# Altium PCB PCB2.PcbDoc
Units mil, origin at the board's own origin, x right, y up, seen from the top; angles counter-clockwise.
Board outline 1968.5 x 2677.17 mil, 2 copper layers (Top Layer, Bottom Layer); 12 components, 9 nets, 57 pads, 13 vias.
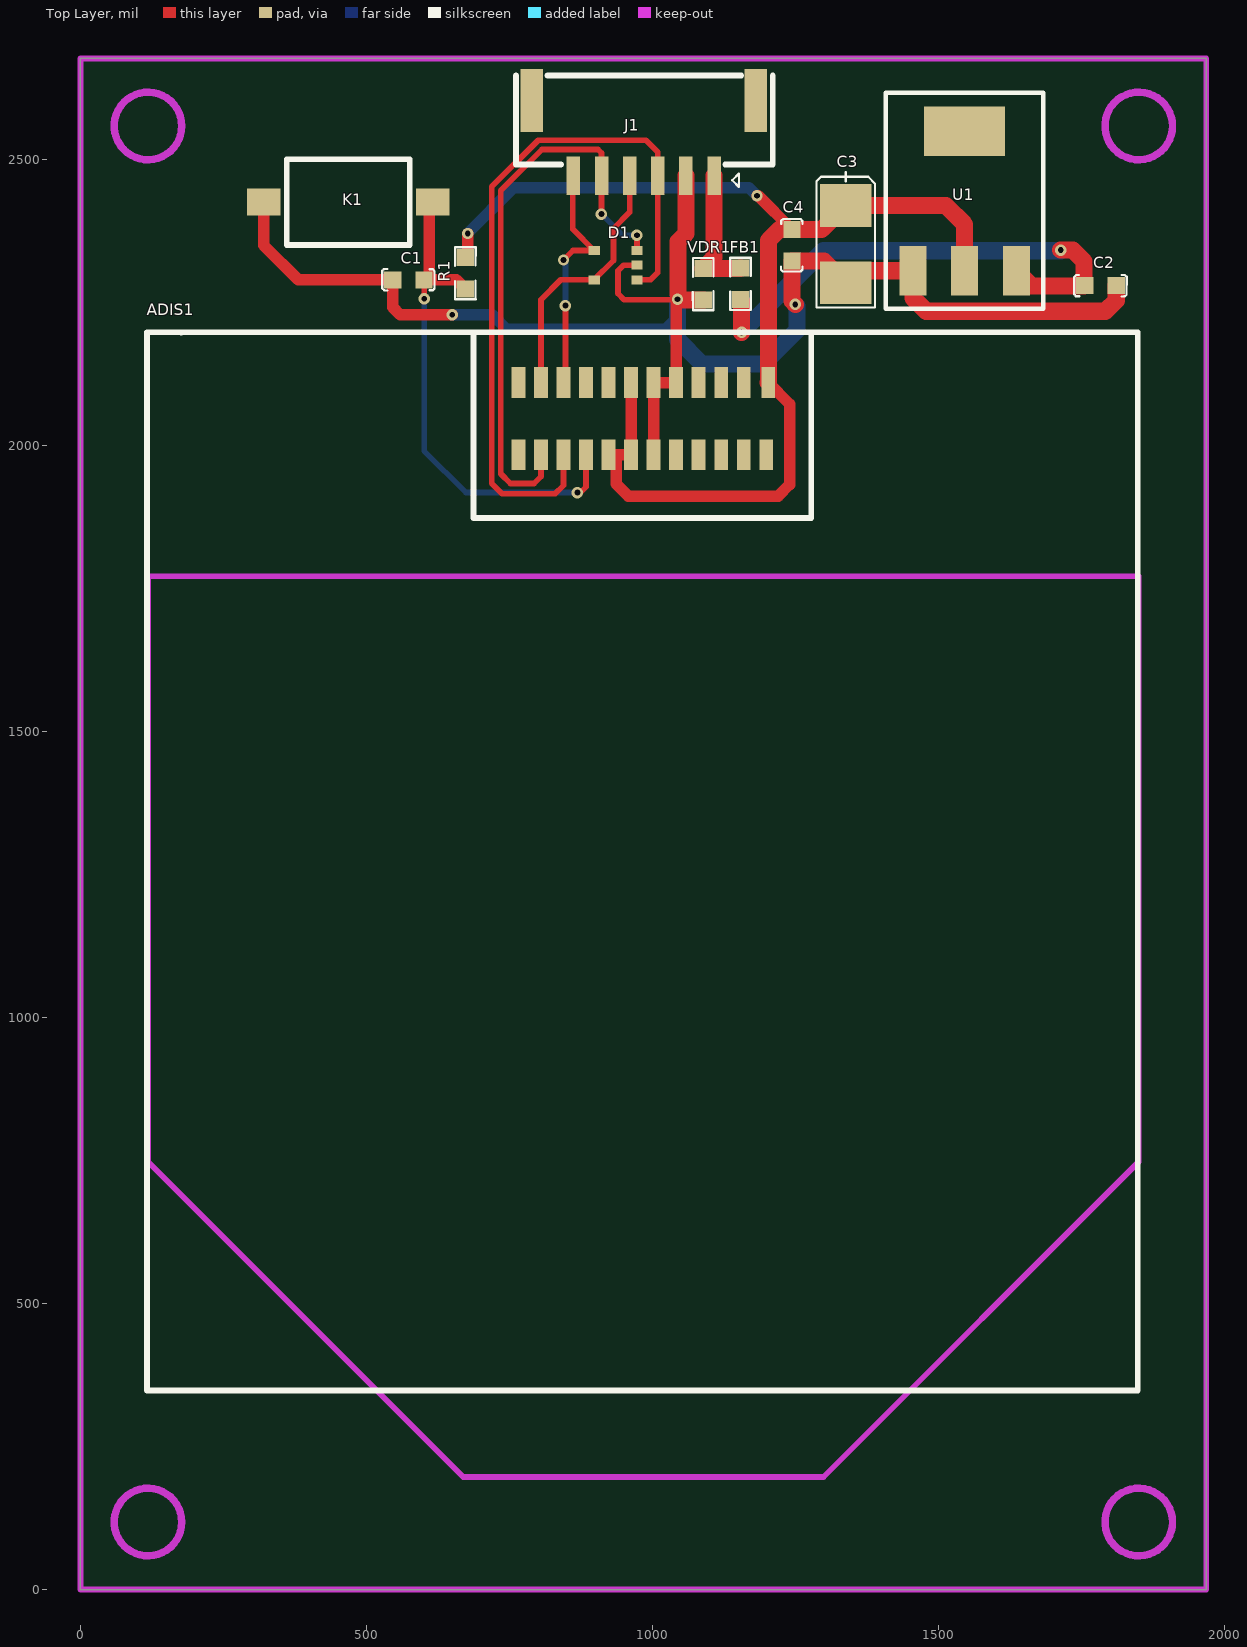
[diagram p0: Top Layer view]
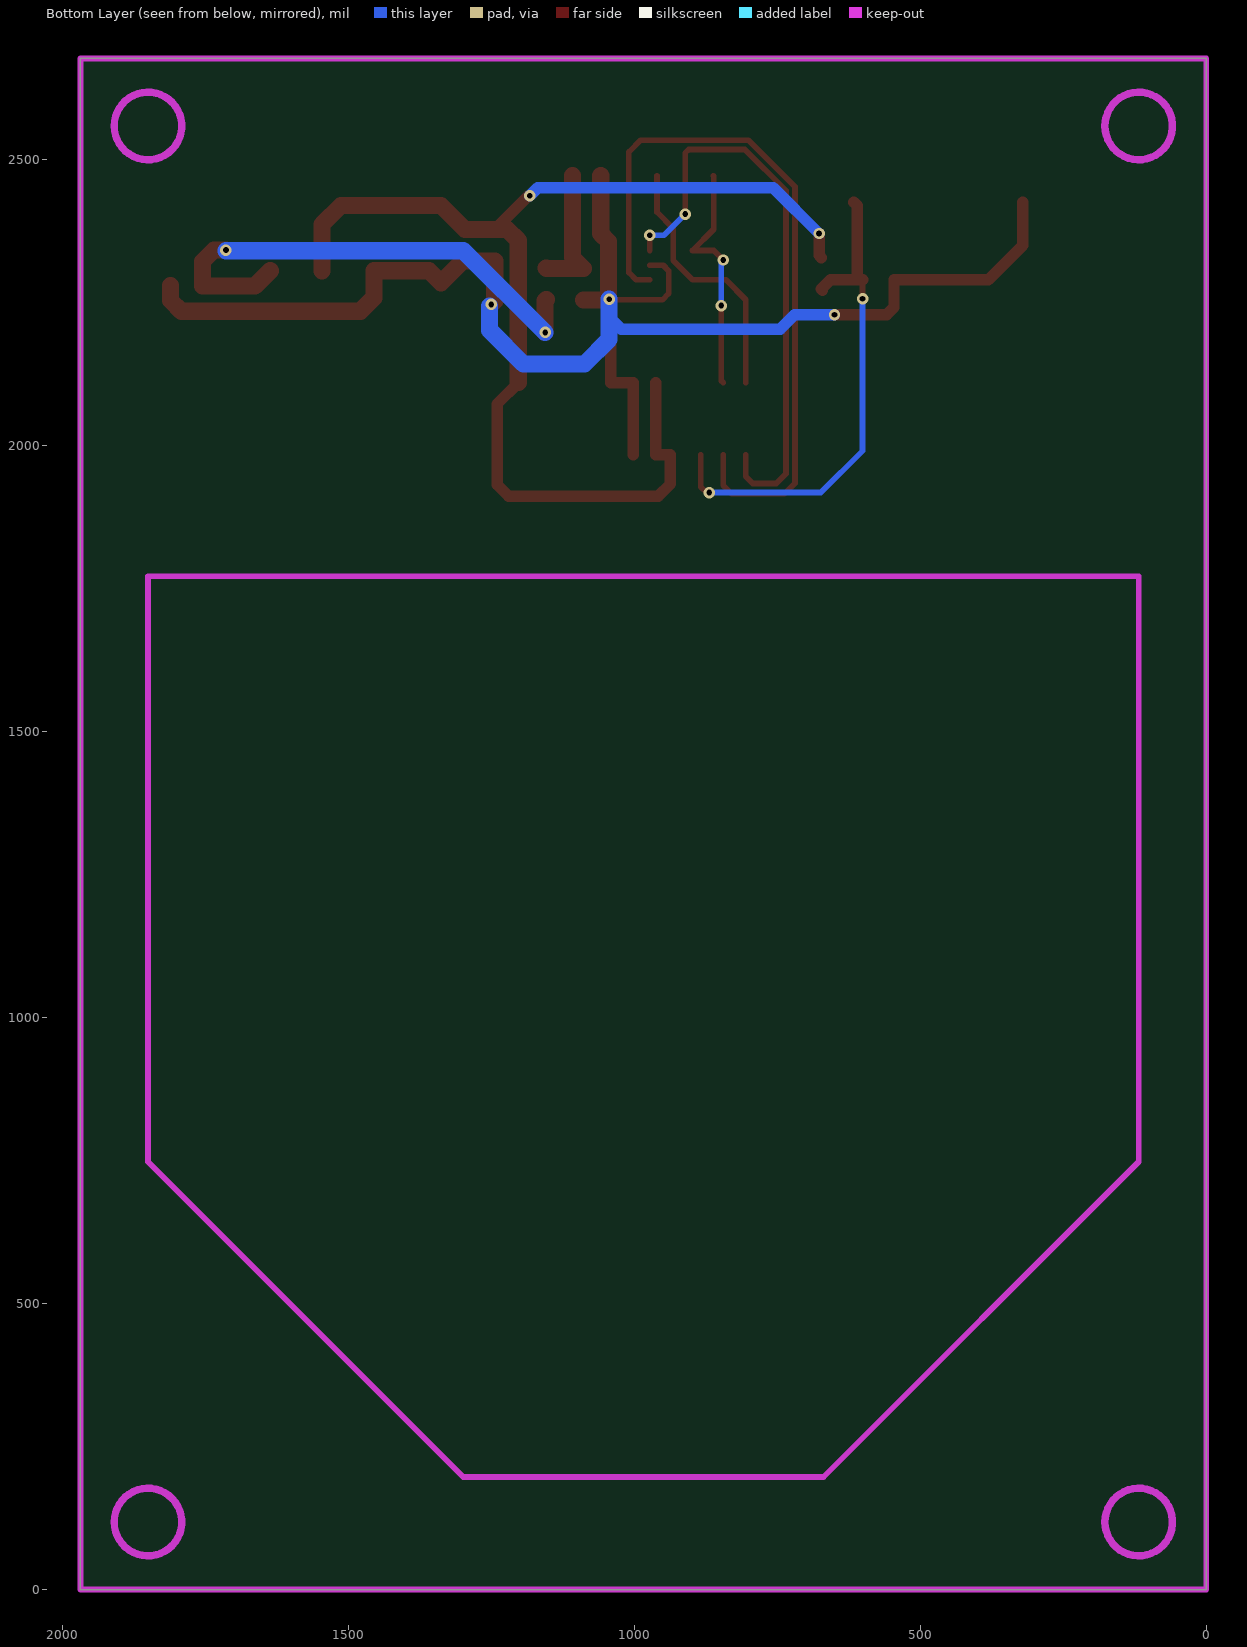
[diagram p1: Bottom Layer view, seen from below]

## Layer stack, top to bottom
Top Solder: solder mask 0.4, Solder Resist, Dk 3.5
Top Layer: signal copper 1.4
Dielectric 1: dielectric 12.6, FR-4, Dk 4.8
Bottom Layer: signal copper 1.4
Bottom Solder: solder mask 0.4, Solder Resist, Dk 3.5

## Board outline
0,0 0,2677.17 1968.5,2677.17 1968.5,0

## Design rules (kind name [scope] priority, off if disabled: settings)
Clearance [All] p1: gap=6
HoleToHoleClearance [All] p1: gap=0 allowstackedmicrovias=TRUE
MinimumSolderMaskSliver [All] p1: minsoldermaskwidth=0
PolygonConnect [All] p1: connectstyle=Relief reliefconductorwidth=10 reliefentries=4 polygonreliefangle="90 Angle" airgapwidth=10
RoutingVias [All] p1: holewidth=10 width=20 viastyle="Through Hole" minholewidth=10 minwidth=20 maxholewidth=10 maxwidth=20
SilkToSilkClearance [All] p1: silktosilkclearance=0
SilkToSolderMaskClearance [IsPad] p1: minsilkscreentomaskgap=0 clearancetoexposedcopper=TRUE
SolderMaskExpansion [All] p1: expansion=4
UnpouredPolygon [All] p1: allowunpoured=FALSE
Width [All] p1: maxlimit=30 minlimit=10 preferedwidth=10
25 further rules are at their usual default settings.

## Components (designator, comment, footprint, x,y, rotation, side; value= is the part's Value field where it differs from the comment)
ADIS1 "iSensor-10" iSensor 984.25,2047.24 r0 top
C1 "0.1uF" 0603C 546,2290 r0 top
C2 "0.1uF" 0603C 1811,2280 r180 top
C3 "22uF/6.3V" 3528/B 1338,2285 r90 top
C4 "0.1uF" 0603C 1244,2323 r90 top
D1 "PESD3V3L4UG" SOT353 973,2290 r180 top
FB1 "742792625" 0603-FB 1154,2283 r270 top
J1 "iSensor" GH1.25-6 1108,2472 r180 top
K1 "RESET_Key" "3*6*2.5 SMD" 616,2426 r180 top
R1 "180K" 0603R 673,2274 r90 top
U1 "AMS1117-3.3V" SOT223 1406,2626 r0 top
VDR1 "82536040" 0603R 1089,2255 r90 top

## Footprints (in the part's own frame and the unit in brackets; to place one, negate y for a bottom-side part, rotate by r counter-clockwise, add the part's x,y. Pads: shape width x height; smd on the part's side, far side on the other; paste and mask are expansions set on the pad)
"3*6*2.5 SMD" [mm]
  rect 1.5x1.2 smd: 1(0,0) 2(7.5,0)
  silkscreen extent 1.02,-1.91 6.48,1.91
0603-FB [mil]
  rect 30x30 smd: 1(-27.5,0) 2(27.5,0)
  silkscreen extent -46,-18 46,18
0603C [mil]
  rect 30x30 smd: 1(0,0) 2(55,0)
  silkscreen extent -19,-18 73,19
0603R [mil]
  rect 30x30 smd: 1(0,0) 2(55,0)
  silkscreen extent -18,-18 73,18
3528/B [mil]
  rect 75x90 smd: 1(135,0) 2(0,0)
  silkscreen extent -43,-51 193,51
GH1.25-6 [mm]
  rect 1x2.8 smd: 0(-1.85,-3.35) 0(8.1,-3.35)
  rect 0.6x1.7 smd: 1(0,0) 2(1.25,0) 3(2.5,0) 4(3.75,0) 5(5,0) 6(6.25,0)
  silkscreen extent -2.6,-4.45 8.8,0.5
iSensor [mil]
  rect 24x54 smd: 1(-218.35,63.03) 2(-218.35,-63.03) 3(-178.98,63.03) 4(-178.98,-63.03) 5(-139.61,63.03) 6(-139.61,-63.03) 7(-100.24,63.03) 8(-100.24,-63.03) 9(-60.87,63.03) 10(-60.87,-63.03) 11(-21.5,63.03) 12(-21.5,-63.03) 13(17.87,63.03) 14(17.87,-63.03) 15(57.24,63.03) 16(57.24,-63.03) 17(96.61,63.03) 18(96.61,-63.03) 19(135.98,63.03) 20(135.98,-63.03) 21(175.35,63.03) 22(175.35,-63.03) 23(218.35,63.03) 24(214.72,-63.03)
  silkscreen extent -868,-1699 864,151
SOT223 [mm]
  rect 1.2x2.2 smd: 1(1.256,-8.128) 2(3.556,-8.128) 3(5.856,-8.128)
  rect 3.6x2.2 smd: ""(3.556,-1.928)
  silkscreen extent 0.06,-9.83 7.06,-0.23
SOT353 [mm]
  rect 0.5x0.4 smd: 1(0,0) 2(0,-0.65) 3(0,-1.3) 4(1.9,-1.3) 5(1.9,0)

## Part data
C1: library part Cap
C2 C4: library part C
C3: library part C-POLAR
FB1: library part FB
J1: library part HEAD1X6
R1: library part R
U1: library part AS1117M3-3.3V, "5V-3.3V"
VDR1: library part Varistor

## Via types
v1: diameter 20, hole 10, Top Layer to Bottom Layer, 13 vias

## Nets (pads, with @x,y where several pads share a name; then routed paths per layer and width w, separated by ;. In a path a pad name is that pad's centre, name@x,y a point inside that pad or via, vN(x,y) a via of type N, cw(c..) or ccw(c..) an arc to the next point about the centre after c; other vN are vias at no path point)
C\S\: ADIS1.6 D1.1 J1.3 | length 1296.6
  Top Layer w10: ADIS1.6 844.64,1930.64 830,1916 737.37,1916 719,1934.37 719,2452.63 800.37,2534 989,2534 1009.57,2513.43 J1.3 1009.57,2302.57 997,2290 D1.1
DIN: ADIS1.5 D1.4 J1.6 | length 424.2
  Top Layer w10: ADIS1.5 848,2113.63 v1(848,2245) ; v1(844.64,2324.64) 861.18,2341.18 D1.4 861,2378.38 861,2471.06 J1.6
  Bottom Layer w10: v1(844.64,2324.64) 848,2321.28 v1(848,2245)
DOUT: ADIS1.4 D1.3 J1.5 | length 1034.9
  Top Layer w10: ADIS1.4 805.27,1946.27 793,1934 752,1934 735,1951 735,2446 807,2518 905,2518 911.15,2511.85 J1.5 911,2471.85 v1(911,2405) ; D1.3 v1(973,2368)
  Bottom Layer w10: v1(911,2405) 948,2368 v1(973,2368)
GND: ADIS1.13 ADIS1.14 ADIS1.15 C1.1 C2.1 C3.2 C4.1 D1.2 J1.2 K1.2 U1.1 VDR1.1 | length 2780.5
  Top Layer w10: D1.2 949.59,2315.59 940,2306 940,2266 951,2255 v1@1041.49,2255 ; v1@1045,2265 1041.49,2261.49 v1@1041.49,2255 ; 1055,2255 v1@1041.49,2255
  Top Layer w20: K1.2 320.72,2350.28 381,2290 C1.1@541,2290 ; C1.1 546,2242 559,2229 v1(650,2229) ; ADIS1.14 ADIS1.13 ADIS1.15 v1@1041.49,2255
  Top Layer w30: v1@1045,2265 1045,2357 1058.79,2370.79 J1.2 ; 1055,2255 VDR1.1 ; v1(1250,2247) 1244,2253 C4.1 1300,2323 C3.2 1359,2306 U1.1 1455.45,2258.55 1479,2235 1792,2235 1811,2254 C2.1
  Bottom Layer w20: v1(650,2229) 720,2229 745,2204 1023,2204 1044,2225
  Bottom Layer w30: v1(1044,2256) 1044,2225 1044,2186 1087,2143 1194,2143 1252.96,2201.96 v1@1252.96,2244.04
NetFB1_1: FB1.1 J1.1 VDR1.2 | length 235.1
  Top Layer w30: J1.1 1108,2329 VDR1.2 1153.5,2310 FB1.1
R\S\T\: ADIS1.8 C1.2 K1.1 R1.1 | length 892.5
  Top Layer w10: v1(601,2257) C1.2 ; v1(869,1918) 874,1918 884.01,1928.01 ADIS1.8
  Top Layer w20: C1.2 C1.2@610,2290 ; K1.1 610,2420 C1.2@610,2290 ; R1.1@671,2272 R1.1 657,2290 C1.2@610,2290
  Bottom Layer w10: v1(601,2257) 601,1991 674,1918 v1(869,1918)
SCLK: ADIS1.3 D1.5 J1.4 | length 460.1
  Top Layer w10: ADIS1.3 805.27,2255.27 840,2290 D1.5 932,2323.8 932,2380 960.36,2408.36 J1.4
VCC3V3: ADIS1.10 ADIS1.11 ADIS1.12 ADIS1.23 C3.1 C4.2 R1.2 U1.2 | length 2102.6
  Top Layer w20: R1.2 677,2333 v1(677,2371) ; ADIS1.11 ADIS1.12 937,1984.21 937,1933 958,1912 1220,1912 1240,1932 1240,2072.88 ADIS1.23 ; v1(1183,2437) 1185,2437 C4.2
  Top Layer w30: ADIS1.23 1203,2110.67 1203,2359 1222,2378 C4.2 1296,2378 C3.1 1513,2420 1546,2387 U1.2
  Bottom Layer w20: v1(677,2371) 757,2451 1169,2451 v1(1183,2437)
VDD5_PERIPH: C2.2 FB1.2 U1.3 | length 897.5
  Top Layer w30: FB1.2 1156,2253.5 v1(1156,2198) ; U1.3 1663.55,2279 1755,2279 1755,2322 1735,2342 v1(1714,2342)
  Bottom Layer w30: v1(1156,2198) 1299,2341 v1@1714,2341
pads on no net: ADIS1.1 ADIS1.2 ADIS1.7 ADIS1.9 ADIS1.16 ADIS1.17 ADIS1.18 ADIS1.19 ADIS1.20 ADIS1.21 ADIS1.22 ADIS1.24 J1.0 U1.

## Keep-outs
Keep-Out Layer:
  circle w13: c1850.39,2559.06 r59.06
  circle w13: c1850.39,118.11 r59.06
  circle w13: c118.11,2559.06 r59.06
  circle w13: c118.11,118.11 r59.06
  lines w10: 0,0 0,2677.17 1968.5,2677.17 1968.5,0 0,0 ; 118.11,748.03 118.11,1771.65 1850.39,1771.65 1850.39,748.03 1299.21,196.85 669.29,196.85 118.11,748.03